# Altium PCB batt_ctrl_pcb_v3.4.PcbDoc (part 1 of 2)
Units mm, origin at the board's own origin, x right, y up, seen from the top; angles counter-clockwise.
Board outline 70 x 60 mm, 2 copper layers (Top Layer, Bottom Layer); 136 components, 122 nets, 406 pads, 183 vias.
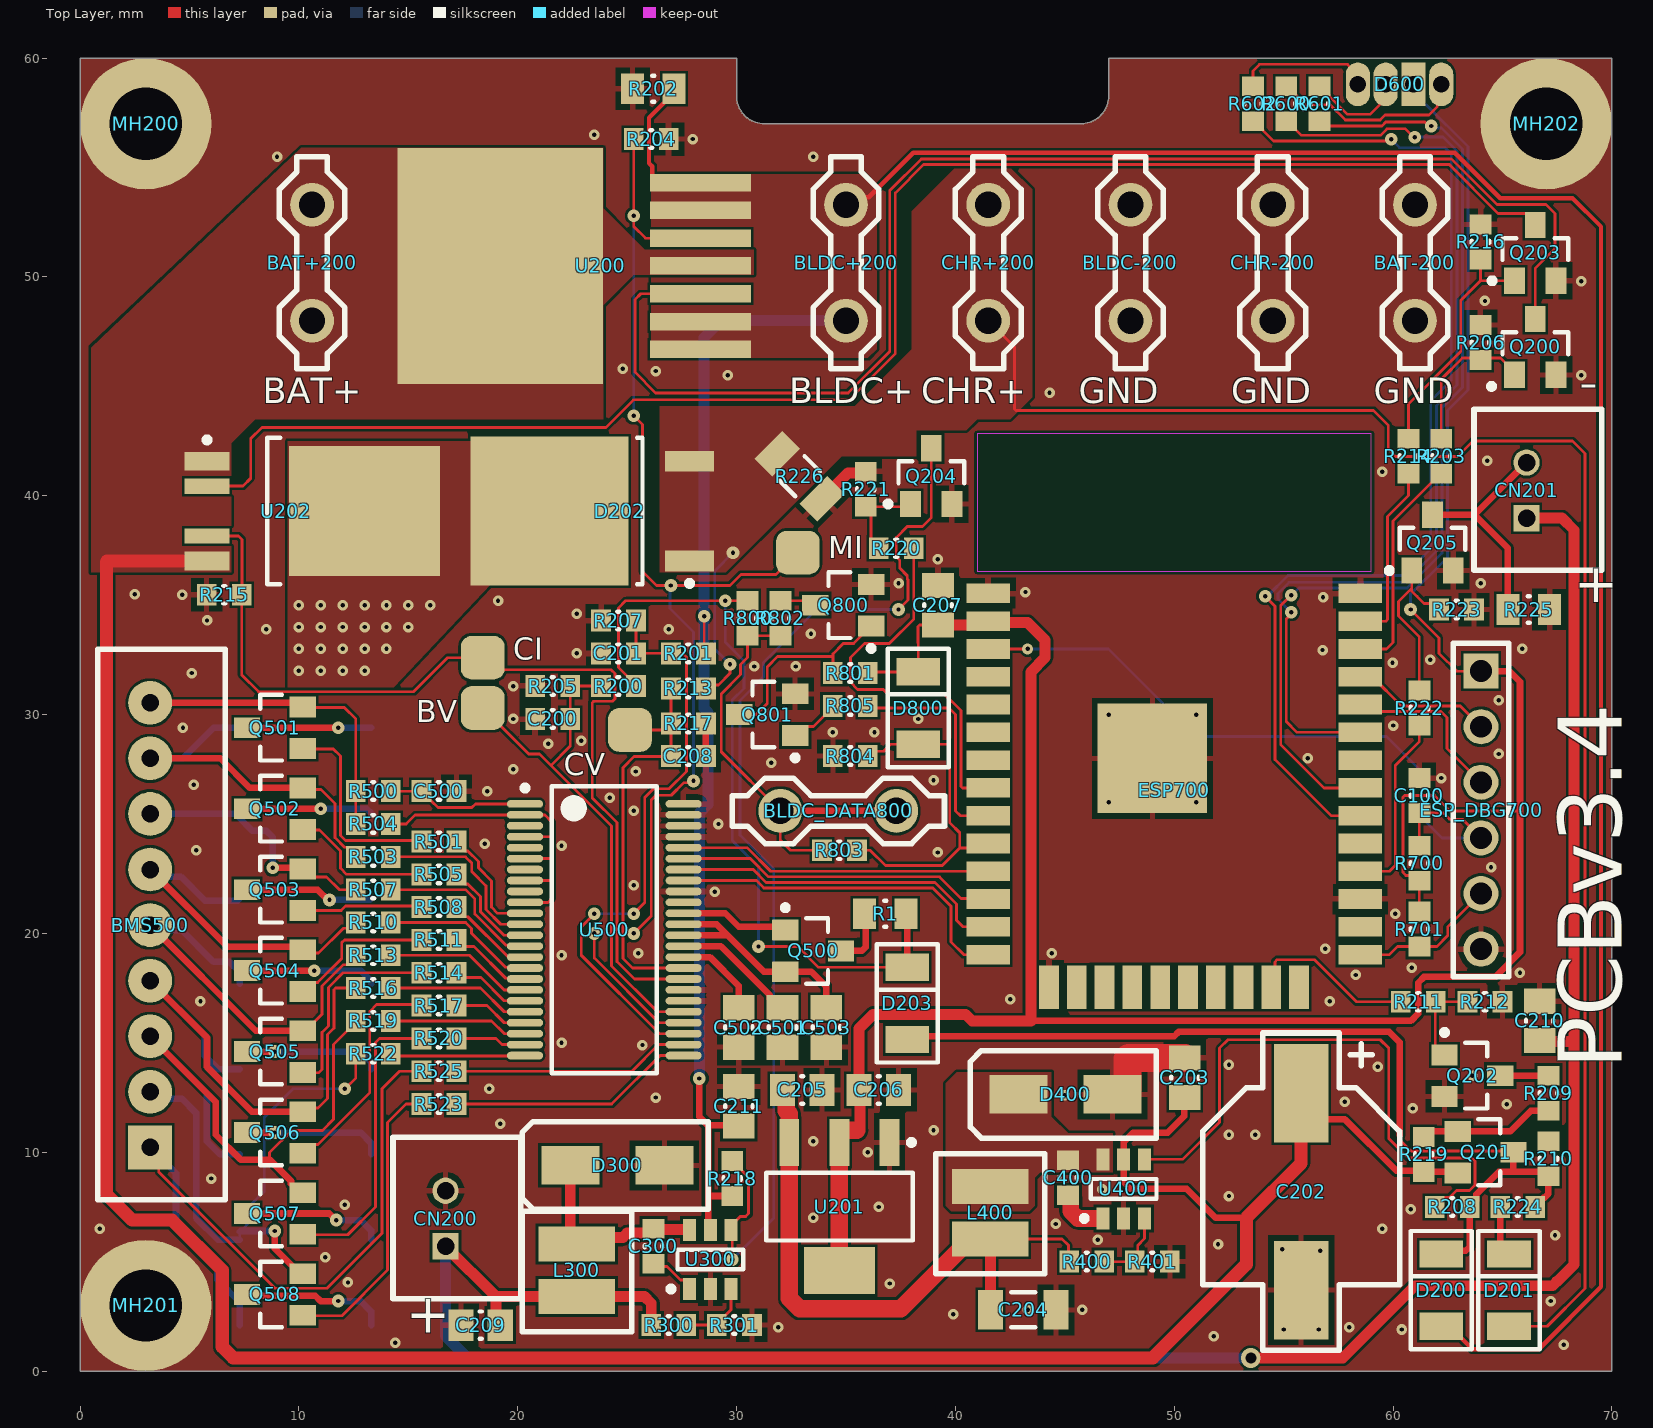
[diagram p0: Top Layer view]
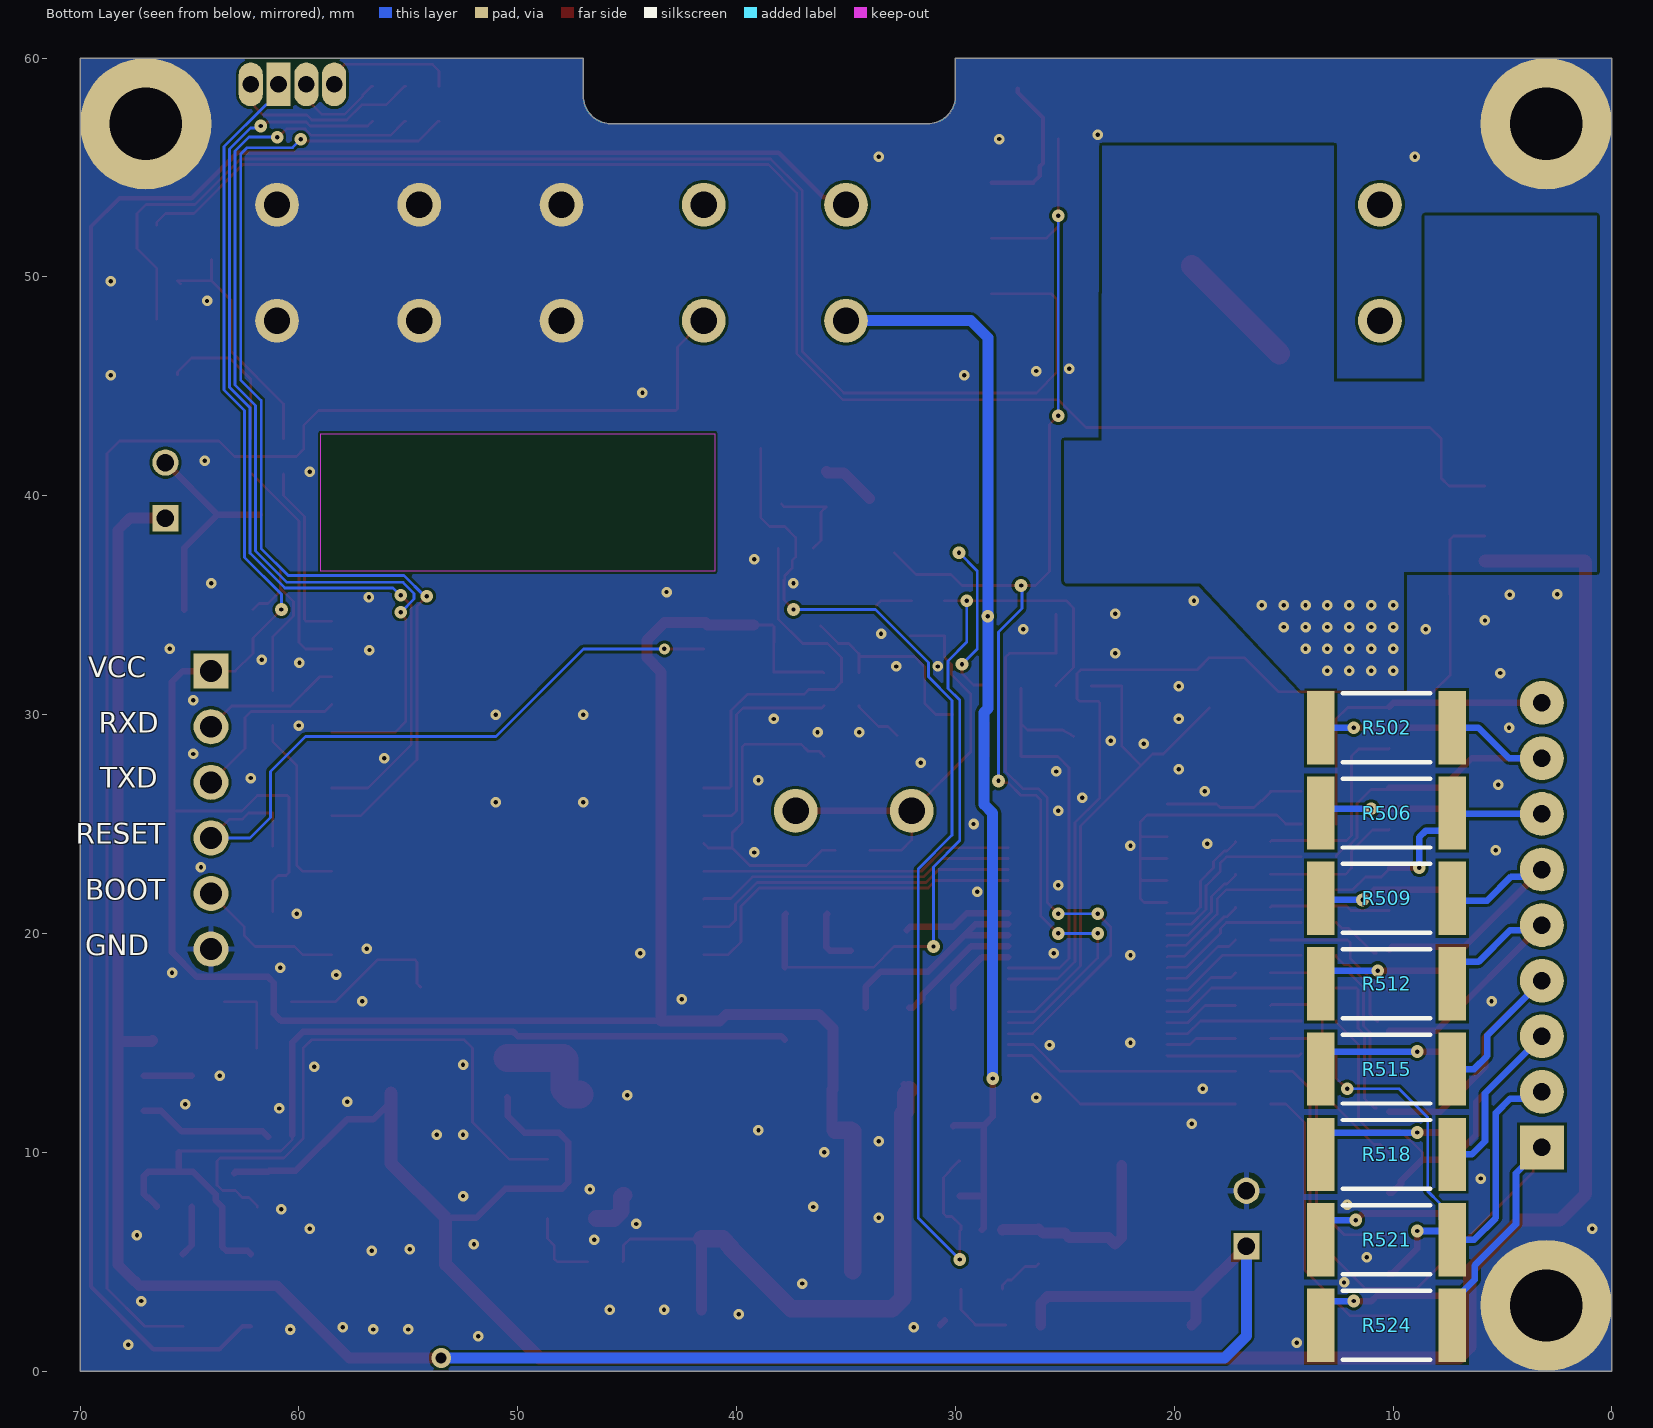
[diagram p1: Bottom Layer view, seen from below]

## Layer stack, top to bottom
Top Solder: solder mask 0.0102, Solder Resist, Dk 3.5
Top Layer: signal copper 0.0356
Dielectric 1: dielectric 0.32, FR-4, Dk 4.8
Bottom Layer: signal copper 0.0356
Bottom Solder: solder mask 0.0102, Solder Resist, Dk 3.5

## Board outline
0,0 0,60 30,60 30,58.27 ccw(c31.27,58.27) 31.27,57 45.73,57 ccw(c45.73,58.27) 47,58.27 47,60 70,60 70,0

## Design rules (kind name [scope] priority, off if disabled: settings)
Clearance [All] p1: gap=0.127 ignorepadtopadclearanceinfootprint=FALSE
DiffPairsRouting [All] p1: maxlimit=0.254 minlimit=0.127 mostfreqgap=0.254 toplayer_minwidth=0.127 toplayer_maxwidth=0.381 toplayer_prefwidth=0.381 bottomlayer_minwidth=0.127 bottomlayer_maxwidth=0.381 bottomlayer_prefwidth=0.381 maxuncoupledlength=12.7
HoleSize [All] p1: absolutevalues=TRUE maxlimit=6.3 minlimit=0.2 maxpercent=80.000 minpercent=20.000
HoleToHoleClearance [All] p1: gap=0.25 allowstackedmicrovias=TRUE
MinimumAnnularRing [All] p1: minimumring=0.13
MinimumSolderMaskSliver [All] p1: minsoldermaskwidth=0.05
PlaneClearance [All] p1: clearance=0.3
PlaneConnect Direct [IsVia] p1: planeconnectstyle=Direct reliefexpansion=0.508 reliefentries=4 reliefconductorwidth=0.254 reliefairgap=0.254
PlaneConnect [All] p2: planeconnectstyle=Relief reliefexpansion=0.508 reliefentries=4 reliefconductorwidth=0.254 reliefairgap=0.254
PolygonConnect DirectPolygonConnect [InNetClass('Direct') or IsVia or (CompParameterValue('ClassName')='DirectGND')] p1: connectstyle=Direct reliefconductorwidth=0.254 reliefentries=4 polygonreliefangle="90 Angle" airgapwidth=0.254
PolygonConnect Mainrule [All] p2: connectstyle=Relief reliefconductorwidth=0.254 reliefentries=4 polygonreliefangle="90 Angle" airgapwidth=0.254
RoutingVias [All] p1: holewidth=0.3 width=0.9 viastyle="Through Hole" minholewidth=0.2 minwidth=0.58 maxholewidth=6.3 maxwidth=8
SilkToSilkClearance [All] p1: silktosilkclearance=0.2
SilkToSolderMaskClearance [IsPad] p1: minsilkscreentomaskgap=0.15 clearancetoexposedcopper=TRUE
SolderMaskExpansion [All] p1: expansion=0.05 istentingtop=FALSE
SupplyNets "Schematic Supply Nets_3" [InNet('VCC')] p1: voltage=0.000
SupplyNets "Schematic Supply Nets_2" [InNet('GND')] p2: voltage=0.000
SupplyNets "Schematic Supply Nets_1" [InNet('BATT_POS')] p3: voltage=0.000
SupplyNets "Schematic Supply Nets" [InNet('+5V')] p4: voltage=0.000
UnRoutedNet [All] p1: checkbadconnections=TRUE
Width [All] p1: maxlimit=5 minlimit=0.127 preferedwidth=0.3
21 further rules are at their usual default settings.

## Classes and differential pairs
component class U_LTC6804-2_8S+TR: BMS500 C500 C501 C502 C503 Q500 Q501 Q502 Q503 Q504 Q505 Q506 Q507 Q508 R1 R500 R501 R502 R503 R504 R505 R506 R507 R508 R509 R510 R511 R512 R513 R514 R515 R516 R517 R518 R519 R520 R521 R522 R523 R524 R525 U500
component class top_sheet: C100
component class Indication: D600 R600 R601 R602
net class HV: BATT_POS BLDC_POS CHR_POS CHR_SUP
component class interface: BLDC_DATA800 D800 Q800 Q801 R800 R801 R802 R803 R804 R805
channel class ME3116_5V: U_ME3116_5V1 U_ME3116_5V2
component class U_ME3116_5V1: C300 D300 L300 R300 R301 U300
component class Power: BAT+200 BAT-200 BLDC+200 BLDC-200 C200 C201 C202 C203 C204 C205 C206 C207 C208 C209 C210 C211 CHR+200 CHR-200 CN200 CN201 D200 D201 D202 D203 D? MH200 MH201 MH202 Q200 Q201 Q202 Q203 Q204 Q205 Q? R200 R201 R202 R203 R204 R205 R206 R207 R208 R209 R210 R211 R212 R213 R214 R215 R216 R217 R218 R219 R220 R221 R222 R223 R224 R225 R226 R?1 U200 U201 U202
net class Direct: BATT_POS BLDC_POS CHR_POS CHR_SUP U_ME3116_5V1_BS U_ME3116_5V1_SW U_ME3116_5V2_BS U_ME3116_5V2_SW
component class U_ME3116_5V2: C400 D400 L400 R400 R401 U400
component class U_ESP32_WROOM2: ESP700 ESP_DBG700 R700 R701

## Components (designator, comment, footprint, x,y, rotation, side; value= is the part's Value field where it differs from the comment)
BAT+200 "Crimp 6.3 single PCB" "Crimp 6.3mm single PCB" 10,45.8 r0 top locked (schematic designator BAT+)
BAT-200 "Crimp 6.3 single PCB" "Crimp 6.3mm single PCB" 61.6,55.5 r180 top locked (schematic designator BAT-)
BLDC+200 "Crimp 6.3 single PCB" "Crimp 6.3mm single PCB" 34.4,45.8 r0 top locked (schematic designator BLDC+)
BLDC-200 "Crimp 6.3 single PCB" "Crimp 6.3mm single PCB" 48.6,55.5 r180 top locked (schematic designator BLDC-)
BLDC_DATA800 "Crimp 6.3 single PCB" "Crimp 6.3mm single PCB" 29.8,26.2 r270 top locked (schematic designator BLDC_DATA)
BMS500 "PIN HEADER 1x9" "XH2.54 9P" 3.2,10.22 r180 top (schematic designator BMS)
C100 "100n" CAPC0603(1608)55_N 61.2,26.3 r90 top
C200 "100n" CAPC0603(1608)55_N 21.6,29.8 r180 top
C201 "100n" CAPC0603(1608)55_N 24.6,32.8 r180 top
C202 "220uF 35V" "10X10.5 CAPACITOR" 55.8,12.7 r270 top
C203 "6u8" CAPC0805(2012)75_N 50.482,13.406 r270 top
C204 "100u" CAPC1206(3216)75_N 43.1,2.8 r0 top
C205 "6u8" CAPC0805(2012)75_N 33,12.85 r0 top
C206 "6u8" CAPC0805(2012)75_N 36.5,12.85 r0 top
C207 "6u8" CAPC0805(2012)75_N 39.2,35 r90 top
C208 "100n" CAPC0603(1608)55_N 27.8,28.1 r0 top
C209 "6u8" CAPC0805(2012)75_N 18.3,2.1 r180 top
C210 "6u8" CAPC0805(2012)75_N 66.7,16 r90 top
C211 "6u8" CAPC0805(2012)75_N 30.1,12.1 r90 top
C300 "1n" CAPC0603(1608)55_N 26.2,5.7 r90 top (schematic designator C1)
C400 "1n" CAPC0603(1608)55_N 45.148,8.834 r90 top (schematic designator C1)
C500 "100n" CAPC0603(1608)55_N 16.4,26.5 r0 top (schematic designator C1)
C501 "1u" CAPC0805(2012)75_N 32.1,15.7 r270 top (schematic designator C2)
C502 "1u" CAPC0805(2012)75_N 30.1,15.7 r270 top (schematic designator C3)
C503 "1u" CAPC0805(2012)75_N 34.1,15.7 r270 top (schematic designator C4)
CHR+200 "Crimp 6.3 single PCB" "Crimp 6.3mm single PCB" 40.9,45.8 r0 top locked (schematic designator CHR+)
CHR-200 "Crimp 6.3 single PCB" "Crimp 6.3mm single PCB" 55.1,55.5 r180 top locked (schematic designator CHR-)
CN200 "PIN HEADER 1x2" "XH2.54 2P" 16.7,5.7 r180 top
CN201 "PIN HEADER 1x2" "XH2.54 2P" 66.1,38.975 r180 top
D200 "1N4148" SOD80 62.2,3.7 r90 top
D201 "1N4148" SOD80 65.3,3.7 r90 top
D202 "45V 10A" DPAK 23.4,39.3 r180 top
D203 "1N4148" SOD80 37.8,16.8 r90 top
D300 "SS14" SMA 26.7,9.4 r180 top (schematic designator D1)
D400 "SS14" SMA 47.18,12.644 r180 top (schematic designator D1)
D600 "Generic RGB led" "RGB THROU HOLE 90 DEG" 62.2,58.8 r90 top locked (schematic designator D400)
D800 "1N4148" SOD80 38.3,30.3 r90 top (schematic designator D300)
ESP700 "ESP32" ESP32-WROOM 41.5,35.54 r0 top locked (schematic designator ESP1)
ESP_DBG700 "PIN HEADER 1x6" "PIN HEADER SINGLE 6" 64.018,31.984 r0 top locked (schematic designator ESP_DBG)
L300 "4u7" CD32 22.7,5.8 r270 top (schematic designator L1)
L400 "4u7" CD32 41.592,8.44 r270 top (schematic designator L1)
MH200 "Mounting Hole" MH_M3 3,57 r0 top
MH201 "Mounting Hole" MH_M3 3,3 r0 top
MH202 "Mounting Hole" MH_M3 67,57 r0 top
Q200 "MMBT3904" SOT23 66.5,46.8 r90 top
Q201 "MMBT3906" SOT23 64.225,10 r0 top
Q202 "MMBT3904" SOT23 63.625,13.5 r0 top
Q203 "MMBT3904" SOT23 66.5,51.1 r90 top
Q204 "MMBT3904" SOT23 38.9,40.9 r90 top
Q205 "MMBT3904" SOT23 61.8,37.858 r90 top
Q500 "MMBT3904" SOT23 33.5,19.2 r0 top (schematic designator Q9)
Q501 "BSS308PE" SOT23 8.9,29.4 r180 top (schematic designator Q8)
Q502 "BSS308PE" SOT23 8.9,25.7 r180 top (schematic designator Q7)
Q503 "BSS308PE" SOT23 8.9,22 r180 top (schematic designator Q6)
Q504 "BSS308PE" SOT23 8.9,18.3 r180 top (schematic designator Q5)
Q505 "BSS308PE" SOT23 8.9,14.6 r180 top (schematic designator Q4)
Q506 "BSS308PE" SOT23 8.9,10.9 r180 top (schematic designator Q3)
Q507 "BSS308PE" SOT23 8.9,7.2 r180 top (schematic designator Q2)
Q508 "BSS308PE" SOT23 8.9,3.5 r180 top (schematic designator Q1)
Q800 "MMBT3904" SOT23 34.875,35 r180 top (schematic designator Q300)
Q801 "MMBT3904" SOT23 31.4,30 r180 top (schematic designator Q301)
R1 "100" RESC0805(2012)_N 36.8,20.9 r180 top (schematic designator R27)
R200 "100k 1%" RESC0603(1608)_N 24.6,31.3 r0 top
R201 "100k 1%" RESC0603(1608)_N 27.8,32.8 r0 top
R202 "10k" RESC0805(2012)_N 26.2,58.6 r0 top
R203 "1k" RESC0603(1608)_N 62.2,41.8 r90 top
R204 "1k 1%" RESC0603(1608)_N 26.1,56.3 r180 top
R205 "10k 1%" RESC0603(1608)_N 21.6,31.3 r0 top
R206 "1k" RESC0603(1608)_N 64,47 r270 top
R207 "10k 1%" RESC0603(1608)_N 24.6,34.296 r0 top
R208 "10k" RESC0603(1608)_N 62.7,7.5 r0 top
R209 "10k" RESC0603(1608)_N 67.1,12.7 r90 top
R210 "10k" RESC0603(1608)_N 67.1,9.7 r90 top
R211 "1k" RESC0603(1608)_N 61.15,16.876 r0 top
R212 "1k" RESC0603(1608)_N 64.2,16.876 r180 top
R213 "10k 1%" RESC0603(1608)_N 27.8,31.2 r0 top
R214 "1k" RESC0603(1608)_N 60.7,41.8 r90 top
R215 "1k 1%" RESC0603(1608)_N 6.585,35.475 r0 top
R216 "1k" RESC0603(1608)_N 64,51.6 r270 top
R217 "1k 1%" RESC0603(1608)_N 27.8,29.6 r180 top
R218 "10k" RESC0603(1608)_N 29.8,8.8 r270 top
R219 "1k" RESC0603(1608)_N 61.4,9.9 r270 top
R220 "1k" RESC0603(1608)_N 37.3,37.6 r0 top
R221 "1k" RESC0603(1608)_N 35.9,40.3 r90 top
R222 "1k" RESC0603(1608)_N 61.2,30.3 r90 top
R223 "1k" RESC0603(1608)_N 62.9,34.8 r180 top
R224 "1k" RESC0603(1608)_N 65.7,7.5 r0 top
R225 "150" RESC0805(2012)_N 66.2,34.8 r180 top
R226 "5k6" RESC1206(3216)_N 32.893,40.894 r135 top
R300 "56k" RESC0603(1608)_N 26.9,2.1 r180 top (schematic designator R1)
R301 "10k" RESC0603(1608)_N 29.9,2.1 r180 top (schematic designator R2)
R400 "56k" RESC0603(1608)_N 46,5 r180 top (schematic designator R1)
R401 "10k" RESC0603(1608)_N 49,5 r180 top (schematic designator R2)
R500 "100" RESC0603(1608)_N 13.4,26.5 r0 top (schematic designator R26)
R501 "10k" RESC0603(1608)_N 16.4,24.2 r0 top (schematic designator R24)
R502 "12" RESC2512(6432)_N 10.3,29.4 r0 bottom (schematic designator R8)
R503 "100" RESC0603(1608)_N 13.4,23.5 r0 top (schematic designator R23)
R504 "100" RESC0603(1608)_N 13.4,25 r0 top (schematic designator R25)
R505 "10k" RESC0603(1608)_N 16.4,22.7 r0 top (schematic designator R22)
R506 "12" RESC2512(6432)_N 10.3,25.5 r0 bottom (schematic designator R7)
R507 "100" RESC0603(1608)_N 13.4,22 r0 top (schematic designator R21)
R508 "10k" RESC0603(1608)_N 16.4,21.2 r0 top (schematic designator R20)
R509 "12" RESC2512(6432)_N 10.3,21.6 r0 bottom (schematic designator R6)
R510 "100" RESC0603(1608)_N 13.4,20.5 r0 top (schematic designator R19)
R511 "10k" RESC0603(1608)_N 16.4,19.7 r0 top (schematic designator R18)
R512 "12" RESC2512(6432)_N 10.3,17.7 r0 bottom (schematic designator R5)
R513 "100" RESC0603(1608)_N 13.4,19 r0 top (schematic designator R17)
R514 "10k" RESC0603(1608)_N 16.4,18.2 r0 top (schematic designator R16)
R515 "12" RESC2512(6432)_N 10.3,13.8 r0 bottom (schematic designator R4)
R516 "100" RESC0603(1608)_N 13.4,17.5 r0 top (schematic designator R15)
R517 "10k" RESC0603(1608)_N 16.4,16.7 r0 top (schematic designator R14)
R518 "12" RESC2512(6432)_N 10.3,9.9 r0 bottom (schematic designator R3)
R519 "100" RESC0603(1608)_N 13.4,16 r0 top (schematic designator R13)
R520 "10k" RESC0603(1608)_N 16.4,15.2 r0 top (schematic designator R12)
R521 "12" RESC2512(6432)_N 10.3,6 r0 bottom (schematic designator R2)
R522 "100" RESC0603(1608)_N 13.4,14.5 r0 top (schematic designator R11)
R523 "10k" RESC0603(1608)_N 16.4,12.2 r0 top (schematic designator R10)
R524 "12" RESC2512(6432)_N 10.3,2.1 r0 bottom (schematic designator R1)
R525 "100" RESC0603(1608)_N 16.4,13.7 r0 top (schematic designator R9)
R600 "330" RESC0603(1608)_N 55.118,57.912 r270 top (schematic designator R400)
R601 "330" RESC0603(1608)_N 56.642,57.912 r270 top (schematic designator R401)
R602 "330" RESC0603(1608)_N 53.594,57.912 r270 top (schematic designator R402)
R700 "10k" RESC0603(1608)_N 61.2,23.2 r90 top (schematic designator R1)
R701 "1k" RESC0603(1608)_N 61.2,20.2 r270 top (schematic designator R2)
R800 "4k7" RESC0603(1608)_N 30.5,34.4 r90 top (schematic designator R300)
R801 "1k" RESC0603(1608)_N 35.2,31.9 r0 top (schematic designator R301)
R802 "10" RESC0603(1608)_N 32,34.4 r270 top (schematic designator R302)
R803 "390k" RESC0603(1608)_N 34.7,23.8 r180 top (schematic designator R303)
R804 "47k" RESC0603(1608)_N 35.2,28.1 r0 top (schematic designator R304)
R805 "1k" RESC0603(1608)_N 35.2,30.4 r180 top (schematic designator R305)
U200 "BTS50085" PG-TO220-7-4 19.2,50.5 r90 top locked
U201 "AMS1117-3V3" SOT229P700X180-4N 34.7,7.52 r270 top
U202 "BTS6143D" ITO252-5-11_M 10.6,39.3 r0 top
U300 "ME3116" SOT23-6 28.8,5.1 r90 top (schematic designator U2)
U400 "ME3116" SOT23-6 47.688,8.326 r90 top (schematic designator U2)
U500 "LTC6804-2" SSOP48 23.956,20.168 r0 top locked (schematic designator U1)

## Footprints (in the part's own frame and the unit in brackets; to place one, negate y for a bottom-side part, rotate by r counter-clockwise, add the part's x,y. Pads: shape width x height; smd on the part's side, far side on the other; paste and mask are expansions set on the pad)
"10X10.5 CAPACITOR" [mm]
  rect 4.5x2.5 smd: +(0,0) -(9,0)
  silkscreen extent -2.75,-4.5 11.75,4.5, body extent -0.7,-4.15 9.2,4.15, height 10.2
CAPC0603(1608)55_N [mm] "Chip Capacitor, Body 1.6x0.8mm, Height 0.55mm, IPC Medium Density"
  rect 0.9x1 smd: 1(-0.8,0) 2(0.8,0)
  silkscreen extent -0.05,-0.4 0.05,0.4, body extent -0.87,-0.48 0.88,0.47, height 0.55
CAPC0805(2012)75_N [mm] "Chip Capacitor, Body 2.0x1.2mm, Height 0.75mm, IPC Medium Density"
  rect 1.15x1.45 smd: 1(-0.9,0) 2(0.9,0)
  silkscreen extent -0.05,-0.62 0.05,0.63, body extent -1.1,-0.72 1.1,0.73, height 0.75
CAPC1206(3216)75_N [mm] "Chip Capacitor, Body 3.2x1.6mm, Height 0.75mm, IPC Medium Density"
  rect 1.15x1.8 smd: 1(-1.5,0) 2(1.5,0)
  silkscreen extent -0.55,-0.8 0.55,0.8, body extent -1.7,-0.9 1.7,0.9, height 0.75
CD32 [mm] "SMD inductor"
  rect 1.6x3.5 smd: 1(0,0) 2(2.4,0)
  silkscreen extent -1.5,-2.5 4,2.5, body extent -0.45,-1.5 2.85,1.5, height 2.1
"Crimp 6.3mm single PCB" [mm]
  round 2 hole 1.2: 1(0.6,2.2) 1(0.6,7.5)
  silkscreen extent -0.9,0 2.1,9.7, body extent 0.2,0.8 1,8.8, height 11
DPAK [mm] "D-PAK, 3-Pads, Body 6,15x6,72mm (max), IPC Medium Density"
  rect 2.25x0.95 smd: 1(-4.45,2.28) 3(-4.45,-2.28)
  rect 7.2x6.8 smd: 2(1.95,0)
  silkscreen extent -4.57,-3.35 -2.05,3.43, body extent -4.81,-3.27 5.13,3.27, height 2.44
ESP32-WROOM [mm] "ESP32-WROOM-32 is a powerful, generic Wi-Fi+BT+BLE MCU module"
  rect 2x0.9 smd: 1(0,0) 2(0,-1.27) 3(0,-2.54) 4(0,-3.81) 5(0,-5.08) 6(0,-6.35) 7(0,-7.62) 8(0,-8.89) 9(0,-10.16) 10(0,-11.43) 11(0,-12.7) 12(0,-13.97) 13(0,-15.24) 14(0,-16.51) 25(17,-16.51) 26(17,-15.24) 27(17,-13.97) 28(17,-12.7) 29(17,-11.43) 30(17,-10.16) 31(17,-8.89) 32(17,-7.62) 33(17,-6.35) 34(17,-5.08) 35(17,-3.81) 36(17,-2.54) 37(17,-1.27) 38(17,0)
  rect 0.9x2 smd: 15(2.775,-18) 16(4.045,-18) 17(5.315,-18) 18(6.585,-18) 19(7.855,-18) 20(9.125,-18) 21(10.395,-18) 22(11.665,-18) 23(12.935,-18) 24(14.205,-18)
  rect 5x5 smd: 39(7.5,-7.54)
  Keep-Out Layer region: -0.5,1 17.5,1 17.5,7.3 -0.5,7.3
  body extent -0.5,-18.05 17.5,7.45, height 2.91
ITO252-5-11_M [mm] "DPAK, 5-Leads, Body 6.5x6.12mm, Pitch 1.14mm, IPC Low Density"
  rect 2.05x0.85 smd: 1(-4.8,2.28) 5(-4.8,-2.28)
  rect 2.05x0.7 smd: 2(-4.8,1.14) 4(-4.8,-1.14)
  rect 6.9x5.95 smd: 3(2.4,0)
  silkscreen extent -4.92,-3.35 -1.45,3.38, body extent -4.7,-3.25 5.2,3.25, height 2.3
MH_M3 [mm] "Mount hole M3"
  round 6 hole 3.3: 1(0,0)
PG-TO220-7-4 [mm]
  rect 0.8x4.6 smd: 1(-3.81,-9.15) 2(-2.54,-9.15) 3(-1.27,-9.15) 4(0,-9.15) 5(1.27,-9.15) 6(2.54,-9.15) 7(3.81,-9.15)
  rect 10.8x9.4 smd: 8(0,0)
"PIN HEADER SINGLE 6" [mm]
  rect 1.6x1.6 hole 1: 1(0,0)
  round 1.6 hole 1: 2(0,-2.54) 3(0,-5.08) 4(0,-7.62) 5(0,-10.16) 6(0,-12.7)
  silkscreen extent -1.27,-13.97 1.27,1.27, body extent -1.27,-13.97 1.27,1.27, height 8.19
RESC0603(1608)_N [mm] "Chip Resistor, Body 1.6x0.8mm, IPC Medium Density"
  rect 0.9x1 smd: 1(-0.8,0) 2(0.8,0)
  silkscreen extent -0.05,-0.4 0.05,0.4, body extent -0.85,-0.47 0.85,0.47, height 0.6
RESC0805(2012)_N [mm] "Chip Resistor, Body 2.0x1.3mm, IPC Medium Density"
  rect 1.05x1.4 smd: 1(-0.95,0) 2(0.95,0)
  silkscreen extent -0.05,-0.6 0.05,0.6, body extent -1.1,-0.67 1.1,0.68, height 0.7
RESC1206(3216)_N [mm] "Chip Resistor, Body 3.2x1.6mm, IPC Medium Density"
  rect 1.15x1.8 smd: 1(-1.45,0) 2(1.45,0)
  silkscreen extent -0.5,-0.8 0.5,0.8, body extent -1.67,-0.87 1.67,0.87, height 0.75
RESC2512(6432)_N [mm] "Chip Resistor, Body 6.4x3.2mm, IPC Medium Density"
  rect 1.25x3.35 smd: 1(-3,0) 2(3,0)
  silkscreen extent -2,-1.57 2,1.58, body extent -3.13,-1.58 3.17,1.57, height 0.62
"RGB THROU HOLE 90 DEG" [mm]
  oval 2x1.1 hole 0.762: BC(0,3.81) GC(0,2.54) RC(0,0)
  rect 2x1.1 hole 0.762: CA(0,1.27)
  body extent -3,-20.69 3,4.16, height 9.6
SMA [mm] "SMA Diode"
  rect 2.65x1.75 smd: A(0,0) K(4.3,0)
  silkscreen extent -2,-2 6.5,2, body extent -0.53,-1.46 4.75,1.46, height 2.41
SOD80 [mm]
  rect 1.25x2 smd: 1(-1.651,0) 2(1.651,0)
  silkscreen extent -2.7,-1.4 2.7,1.4, body extent -1.84,-0.8 1.86,0.8, height 1.61
SOT23 [mm] "SOT23, 3-Leads, Body 2,90x2,80mm, Pitch 0,95mm, IPC Medium Density"
  rect 1.2x0.95 smd: 1(-1.275,0.95) 2(-1.275,-0.95) 3(1.275,0)
  silkscreen extent -1.92,-1.5 0.67,2.12, body extent -1.13,-1.5 1.13,1.5, height 1.25
SOT23-6 [mm] "SOT23, 6-Leads, Body 2,90x2,80mm, Pitch 0,95mm, IPC Medium Density"
  rect 1x0.6 smd: 1(-1.35,0.95) 2(-1.35,0) 3(-1.35,-0.95) 4(1.35,-0.95) 5(1.35,0) 6(1.35,0.95)
  silkscreen extent -1.47,-1.5 0.45,1.92, body extent -1.4,-1.45 1.4,1.45, height 1.45
SOT229P700X180-4N [mm] "SOT223, 4-Leads, Body 6,50x7,00mm (avg), Pitch 2,29mm, IPC Medium Density"
  rect 2.15x0.9 smd: 1(-2.93,2.29) 2(-2.93,0) 3(-2.93,-2.29)
  rect 2.15x3.25 smd: 4(2.93,0)
  silkscreen extent -3.05,-3.35 1.55,3.42, body extent -3.54,-3.25 3.54,3.25, height 1.65
SSOP48 [mm] "48-Lead Plastic SSOP (5.3mm)"
  oval 1.65x0.35 smd: 1(-3.625,5.75) 2(-3.625,5.25) 3(-3.625,4.75) 4(-3.625,4.25) 5(-3.625,3.75) 6(-3.625,3.25) 7(-3.625,2.75) 8(-3.625,2.25) 9(-3.625,1.75) 10(-3.625,1.25) 11(-3.625,0.75) 12(-3.625,0.25) 13(-3.625,-0.25) 14(-3.625,-0.75) 15(-3.625,-1.25) 16(-3.625,-1.75) 17(-3.625,-2.25) 18(-3.625,-2.75) 19(-3.625,-3.25) 20(-3.625,-3.75) 21(-3.625,-4.25) 22(-3.625,-4.75) 23(-3.625,-5.25) 24(-3.625,-5.75) 25(3.625,-5.75) 26(3.625,-5.25) 27(3.625,-4.75) 28(3.625,-4.25) 29(3.625,-3.75) 30(3.625,-3.25) 31(3.625,-2.75) 32(3.625,-2.25) 33(3.625,-1.75) 34(3.625,-1.25) 35(3.625,-0.75) 36(3.625,-0.25) 37(3.625,0.25) 38(3.625,0.75) 39(3.625,1.25) 40(3.625,1.75) 41(3.625,2.25) 42(3.625,2.75) 43(3.625,3.25) 44(3.625,3.75) 45(3.625,4.25) 46(3.625,4.75) 47(3.625,5.25) 48(3.625,5.75)
  silkscreen extent -3.75,-6.55 2.4,6.6, body extent -3.9,-6.55 3.9,6.55, height 2
"XH2.54 2P" [mm]
  rect 1.2x1.2 hole 0.8: 1(0,0)
  round 1.2 hole 0.8: 2(0,-2.54)
  silkscreen extent -3.44,-4.98 2.4,2.39, body extent -3.35,-4.88 2.49,2.34, height 7.21
"XH2.54 9P" [mm]
  rect 2x2 hole 0.8: 1(0,0)
  round 2 hole 0.8: 2(0,-2.54) 3(0,-5.08) 4(0,-7.62) 5(0,-10.16) 6(0,-12.7) 7(0,-15.24) 8(0,-17.78) 9(0,-20.32)
  silkscreen extent -3.44,-22.76 2.4,2.39, body extent -3.35,-22.66 2.49,2.34, height 7.21

## Part data
BAT+200 BAT-200 BLDC+200 BLDC-200 BLDC_DATA800 CHR+200 CHR-200: "Straight Mount Angle PCB Tab Terminal"
  BAT-200 BLDC-200 CHR-200: ClassName=DirectGND
BMS500: library part "PIN HEADER 2.54 1x9"
C100 C200 C201 C203 C204 C205 C206 C207 C208 C209 C210 C211 C300 C400 C500 C501 C502 C503: library part "Capacitor M", "Ceramic capacitor Medium density"
  C203 C211: Vmax=35v
C202: library part "Capacitor Electrolitic", "Capacitor Electrolitic"
CN200 CN201: library part "PIN HEADER 2.54 1x2", "LIGHT_5V"
  CN200: Parameter 1=LIGHT_5V
  CN201: Parameter 1=LIGHT_5VR
D200 D201 D203 D800: "Small Signal Fast Switching Diodes", Average forward current="150 mA", Diode capacitance="4 pF", Forward continuous current="300 mA", Peak forward surge current="2 A", Repetitive peak forward current="500 mA", Repetitive peak reverse voltage="100 V", Reverse voltage="75 V", Supplier Part Number 1=78-MCL4148, Reverse recovery time="4 ~ 8 ns", Supplier 1=Mouser
D202: library part STPS1045B, "Power schottky rectifier", I=10A, V=45V
D300 D400: "Surface Mount Schottky Barrier Rectifier", Supplier Part Number 1=05R5585, If (av)=1.0A, Ifsm=40A, Supplier 1=Newark, Vf="0.5 ~ 0.75V", Vrrm=40V
D600: library part "RGB led"
ESP700: library part ESP32S, "ESP32-WROOM-32 is a powerful, generic Wi-Fi+BT+BLE MCU module"
ESP_DBG700: library part "PIN HEADER 2.54 1x6"
L300 L400: library part Inductor
Q200 Q202 Q203 Q204 Q205 Q500 Q800 Q801: library part 2N3904, "NPN General Purpose Transistor", Collector Current - Continuous=200mA, Collector-Base Voltage=60V, Collector-Emitter Voltage=40V, DC Current Gain=300
Q201: library part 2N3906, "PNP General Purpose Transistor", Collector Current - Continuous=200mA, Collector-Base Voltage=-60V, Collector-Emitter Voltage=-40V, DC Current Gain=300
Q501 Q502 Q503 Q504 Q505 Q506 Q507 Q508: "OptiMOS™ P3 Small-Signal-Transistor", Id=-2A, Rds=80mOhm, Vds=-30V
R1 R200 R201 R202 R203 R204 R205 R206 R207 R208 R209 R210 R211 R212 R213 R214 R215 R216 R217 R218 R219 R220 R221 R222 R223 R224 R225 R226 R300 R301 R400 R401 R500 R501 R502 R503 R504 R505 R506 R507 R508 R509 R510 R511 R512 R513 R514 R515 R516 R517 R518 R519 R520 R521 R522 R523 R524 R525 R600 R601 R602 R700 R701 R800 R801 R802 R803 R804 R805: library part "Resistor M", "Resistor Medium Density"
  R502 R506 R509 R512 R515 R518 R521 R524: pack=2512
U200: library part BTS50085-1TMA, "Smart Highside High Current Power Switch", Current sense ratio=13000, Load current (ISO)=44A, On-state resistance="9 mOhm", Operating voltage="5.0 .. 58V", Overvoltage protection=70V, Short circuit current limitation=90A, Output clamp=62V
U201: library part AMS1117, "800mA LDO  15V max"
U202: "PROFET Smart Highside Power Switch, 1 Channel, 10 A Load Current, -40 to 150 degC, PG-TO252-5-11, Reel, Green", Load Current (typ)="10 A", Manufacturer=Infineon, Recommended Operating Voltage Max.="38 V", Recommended Operating Voltage Min.="5.5 V", Channels=1, ComponentLink1Description="Manufacturer URL", ComponentLink1URL=http://www.infineon.com/, ComponentLink2Description=Datasheet, ComponentLink2URL=http://www.infineon.com/dgdl/BTS6143D_DS_v10.pdf?folderId=db3a304314dca389011537739e37155f&fileId=db3a3043183a95550118606a2705368e&location=en.Products.Automotive_ICs.Smart_High-_and_Low-Side_Switches.PROFET__-_Smart_High_Side_Switches.DATASHEET.BTS6143D_D, ComponentLink3Description="Package Specification", ComponentLink3URL=http://www.infineon.com/dgdl/TLE7276-Data+Sheet-+v1_11.pdf?folderId=db3a304412b407950112b408e8c90004&fileId=db3a304412b407950112b436c53f66c8&sId=db3a30433db6f09f013dc0e43c0428c1, DatasheetVersion="Rev. 1.0", Green=TRUE, Group="Automotive Qualified", Halogen-free=TRUE, Mounting Technology="Surface Mount", PackageDescription="5-Pin Plastic (Green) Transistor Single Outline Package, 6.5 x 6.12 mm Body, 1.14 mm Pitch", PackageReference=PG-TO252-5-11, PackageVersion=Nov-10, Packing=Reel, PartNumber=BTS6143D, Ptot (max)="59 W", RON @ 25degreesC="10 mOhm", RON(max) @ 150degreesC="18 mOhm", toff (max)="500 us", ton (max)="500 us"
U300 U400: "The ME3116 is PWM DC/DC buck (step-down) regulators.", Frequency=550kHz, FB=0.8V, V in max=45V
U500: "The LTC®6804 is a 3rd generation multicell battery stack / monitor that measures up to 12 series connected battery / cells with a total measurement error of less than 1.2mV. The / cell measurement range of 0V to 5V makes the LTC6804 / suitable for most battery chemistries. All 12 cell voltages / can be captured in 290µs, and lower data acquisition rates / can be selected for high noise reduction."
MH200 MH201 MH202: ClassName=DirectGND

## Free pads (board coordinates)
  rrect50% 2x2 smd: ""(18.4,30.3) ""(18.4,32.6) ""(25.127,29.3) ""(32.8,37.4)

## Via types
v1: diameter 0.48, hole 0.2, Top Layer to Bottom Layer, 147 vias
v2: diameter 0.58, hole 0.2, Top Layer to Bottom Layer, 34 vias
v3: diameter 0.9, hole 0.5, Top Layer to Bottom Layer, 1 vias
v4: diameter 0.5, hole 0.2, Top Layer to Bottom Layer, 1 vias

## Nets (pads, with @x,y where several pads share a name; then routed paths per layer and width w, separated by ;. In a path a pad name is that pad's centre, name@x,y a point inside that pad or via, vN(x,y) a via of type N, cw(c..) or ccw(c..) an arc to the next point about the centre after c; other vN are vias at no path point)
5VREG: C503.1 Q500.2 U500.36 U500.37 | length 10.7
  Top Layer w0.3: U500.36@27.581,19.918 29.582,19.918 ; U500.37@27.581,20.418 29.082,20.418 29.582,19.918 ; C503.1@34.1,16.6 34.1,17.569 33.419,18.25 Q500.2@32.225,18.25 32.221,18.254 31.246,18.254 29.582,19.918
+5V: C204.1 C205.1 L400.2 R400.2 U201.3 | length 28.6
  Top Layer w0.127: L400.2@41.592,6.04 44.872,6.04 45.162,5.75 45.162,5.038 R400.2@45.2,5
  Top Layer w0.305: C205.1@32.1,12.85 C205.1@32.353,13.103
  Top Layer w0.5: 37.5,2.85 37.5,3 ; L400.2@41.592,6.04 41.6,6.032 C204.1@41.6,2.8
  Top Layer w0.8: C205.1@32.1,12.85 32.275,12.675 32.275,11.902 32.408,11.77 32.408,10.402 32.41,10.4 32.41,3.319 32.879,2.85 37.5,2.85 40.242,5.592 40.242,5.64 40.642,6.04 L400.2@41.592,6.04
ADC_EN: D203.2 R1.1 R200.2 R800.2 | length 36.5
  Top Layer w0.127: R200.2@25.4,31.3 25.4,31.35 24.6,32.15 24.6,34.868 24.932,35.2 v2(29.48,35.2) R800.2@30.5,35.2 ; v2(31,19.4) 32.8,19.4 33.749,18.451 D203.2@37.8,18.451
  Top Layer w0.3: R1.1@37.75,20.9 37.8,20.85 D203.2@37.8,18.451
  Bottom Layer w0.127: v2(29.48,35.2) 29.48,33.309 30.34,32.449 30.34,31.2 29.8,30.659 29.8,24.241 31,23.041 v2(31,19.4)
AN0: ESP700.4
AN1: ESP700.5
B\L\D\C\_\E\N\: Q200.3 U200.3 | length 63.8
  Top Layer w0.127: U200.3@28.35,49.23 25.62,49.23 25.353,48.962 25.353,45.647 26.3,44.7 35.1,44.7 37,46.6 37,53.945 38.442,55.386 62.671,55.386 64.75,53.307 66.985,53.307 67.4,52.893 67.4,51.3 66.5,50.4 Q200.3@66.5,48.075
BATT_MEAS: C200.1 pad.@18.4,30.3 R200.1 R205.2 U500.29 | length 24.1
  Top Layer w0.127: pad.@18.4,30.3 20.5,28.2 21,28.2 21.518,27.682 ; R200.1@23.8,31.3 R205.2@22.4,31.3 C200.1@22.4,29.8 22.4,28.564 21.518,27.682 ; U500.29@27.581,16.418 26.382,16.418 24.286,18.514 24.286,24.914 21.518,27.682
BATT_POS: BAT+200.1 C202.+ C203.2 Q201.2 R219.2 U200.4 U200.8 U202.1 U202.5 U400.5 | length 127.8
  Top Layer w0.3: 27.2,0.634 27.234,0.6 ; 30.133,0.6 30.15,0.617 ; C203.2@50.482,12.506 50.456,12.48 50.456,11.656 49.7,10.9 48.128,10.9 47.688,10.46 U400.5@47.688,9.676 47.688,8.625 47.987,8.326 50.574,8.326 51.9,7 53.3,7 ; C202.+@55.8,12.3 56.6,11.5 57.8,11.5 60.15,9.15 61.35,9.15 R219.2@61.4,9.1 62.9,9.1 Q201.2@62.95,9.05
  Top Layer w0.6: 1.2,36.976 1.2,30.2 1.2,8.086 2.386,6.9 4.2,6.9 6.494,4.606 6.494,1.106 7,0.6 27.234,0.6 30.133,0.6 49.025,0.6 53.3,4.875 53.3,7 55.8,9.5 C202.+@55.8,12.7 ; 1.244,37.02 U202.5@5.8,37.02
  Top Layer w1: U200.8@15.2,46.5 U200.8@19.2,50.5
BLDC_EN: ESP700.36 R203.1 | length 10.3
  Top Layer w0.127: ESP700.36@58.5,33 59.7,33 60,33.3 60,38.85 62.15,41 R203.1@62.2,41
BLDC_I_MEAS: pad.@32.8,37.4 R204.2 U200.5 U500.28 | length 57.9
  Top Layer w0.127: v2@23.5,19.9 23.5,18.875 26.457,15.918 U500.28@27.581,15.918 ; v2(25.3,20) 26.1,20.8 26.1,26.1 26.316,26.316 27.016,26.316 27.581,26.881 27.946,26.881 v2(28.033,26.968) ; v2(25.3,43.651) 25.7,43.251 25.7,36.536 26.336,35.9 v2(27,35.9) 29.7,35.9 30.2,36.4 31.8,36.4 pad.@32.8,37.4 ; R204.2@25.3,56.3 v2(25.3,52.796) 25.3,52.3 25.83,51.77 U200.5@28.35,51.77
  Bottom Layer w0.127: v2(23.5,20) v2(25.3,20) ; v2(25.3,43.651) v2(25.3,52.796) ; v2(27,35.9) 26.957,35.857 26.957,34.843 28.033,33.767 v2(28.033,26.968)
BLDC_MEAS: C201.1 R201.1 R207.2 U500.27 | length 27.4
  Top Layer w0.127: v2(23.5,20.9) 22.9,20.3 22.9,19 26.482,15.418 U500.27@27.581,15.418 ; v2(25.3,20.9) 25.8,21.4 25.8,26.2 26.209,26.609 26.92,26.609 27.705,27.395 27.705,32.623 27.529,32.8 R201.1@27,32.8 C201.1@25.4,32.8 R207.2@25.4,34.6
  Bottom Layer w0.127: v2(23.5,20.9) v2(25.3,20.9)
BLDC_POS: BLDC+200.1 C211.1 D200.1 R201.2 R202.2 R218.2 U200.1 U200.2 U200.6 U200.7 U300.5 | length 153.5
  Top Layer w0.127: v2(28.52,34.5) 28.52,33.081 28.7,32.9 R201.2@28.6,32.8
  Top Layer w0.2: R202.2@27.15,58.6 27.15,58.425 26,57.275 26,55.2 26.15,55.05 26.15,54.61 26.45,54.31 U200.7@28.35,54.31 ; BLDC+200.1@35,53.3 35.344,53.644 36.044,53.644 38.077,55.677 62.823,55.677 64.902,53.598 68.202,53.598 69.5,52.3 69.5,3.848 66.652,1 63.624,1 62.575,2.049 D200.1@62.2,2.049
  Top Layer w0.3: v2(28.3,13.368) 28.3,11.625 28.7,11.225 ; U300.5@28.8,6.45 28.7,6.55 28.7,7.983 ; R218.2@29.8,8 28.717,8 28.7,7.983 ; C211.1@30.1,11.2 30.075,11.225 28.7,11.225 ; 28.7,7.983 28.7,11.225
  Bottom Layer w0.5: v2(28.3,13.368) 28.3,25.5 28.7,25.9 28.7,30.099 28.52,30.279 v2(28.52,34.5) ; v2@28.556,34.5 28.52,34.537 28.52,47.22 29.3,48 BLDC+200.1@35,48
BLUE_LED_C: D600.BC R602.1 | length 6.3
  Top Layer w0.127: R602.1@53.594,58.712 53.594,59.412 53.897,59.715 57.913,59.715 58.39,59.239 D600.BC@58.39,58.8
BLUE_LED_OD: ESP700.30 R602.2 | length 49.2
  Top Layer w0.127: R602.2@53.594,57.112 53.644,57.112 54.539,56.217 59.85,56.217 v2(59.919,56.286) ; v2(54.153,35.408) 54.61,34.95 54.61,27.94 57.17,25.38 ESP700.30@58.5,25.38
  Bottom Layer w0.127: v2(54.153,35.408) 54.251,35.408 55.193,36.35 60.487,36.35 61.725,37.588 61.725,44.349 62.662,45.286 62.662,55.605 62.359,55.908 60.297,55.908 v2(59.919,56.286)
BOOT: ESP700.25 ESP_DBG700.5 R701.2 | length 6.9
  Top Layer w0.127: ESP700.25@58.5,19.03 59.83,19.03 60.2,19.4 R701.2@61.2,19.4 62,19.4 62.494,19.894 62.494,20.3 ESP_DBG700.5@64.018,21.824
BRAKE_LIGHT_ON: ESP700.28 R222.1 | length 8.6
  Top Layer w0.127: ESP700.28@58.5,22.84 59.84,22.84 60.1,23.1 60.1,27.676 61.2,28.776 R222.1@61.2,29.5